# Altium PCB AVR精简学习板_加粗.PCBDOC (part 2 of 2)
Units mm, origin at the board's own origin, x right, y up, seen from the top; angles counter-clockwise.
Board outline 152.4 x 101.6 mm, 2 copper layers (Top Layer, Bottom Layer); 44 components, 51 nets, 211 pads, 1 vias.
Unrouted connection lines stored in the file: 1.
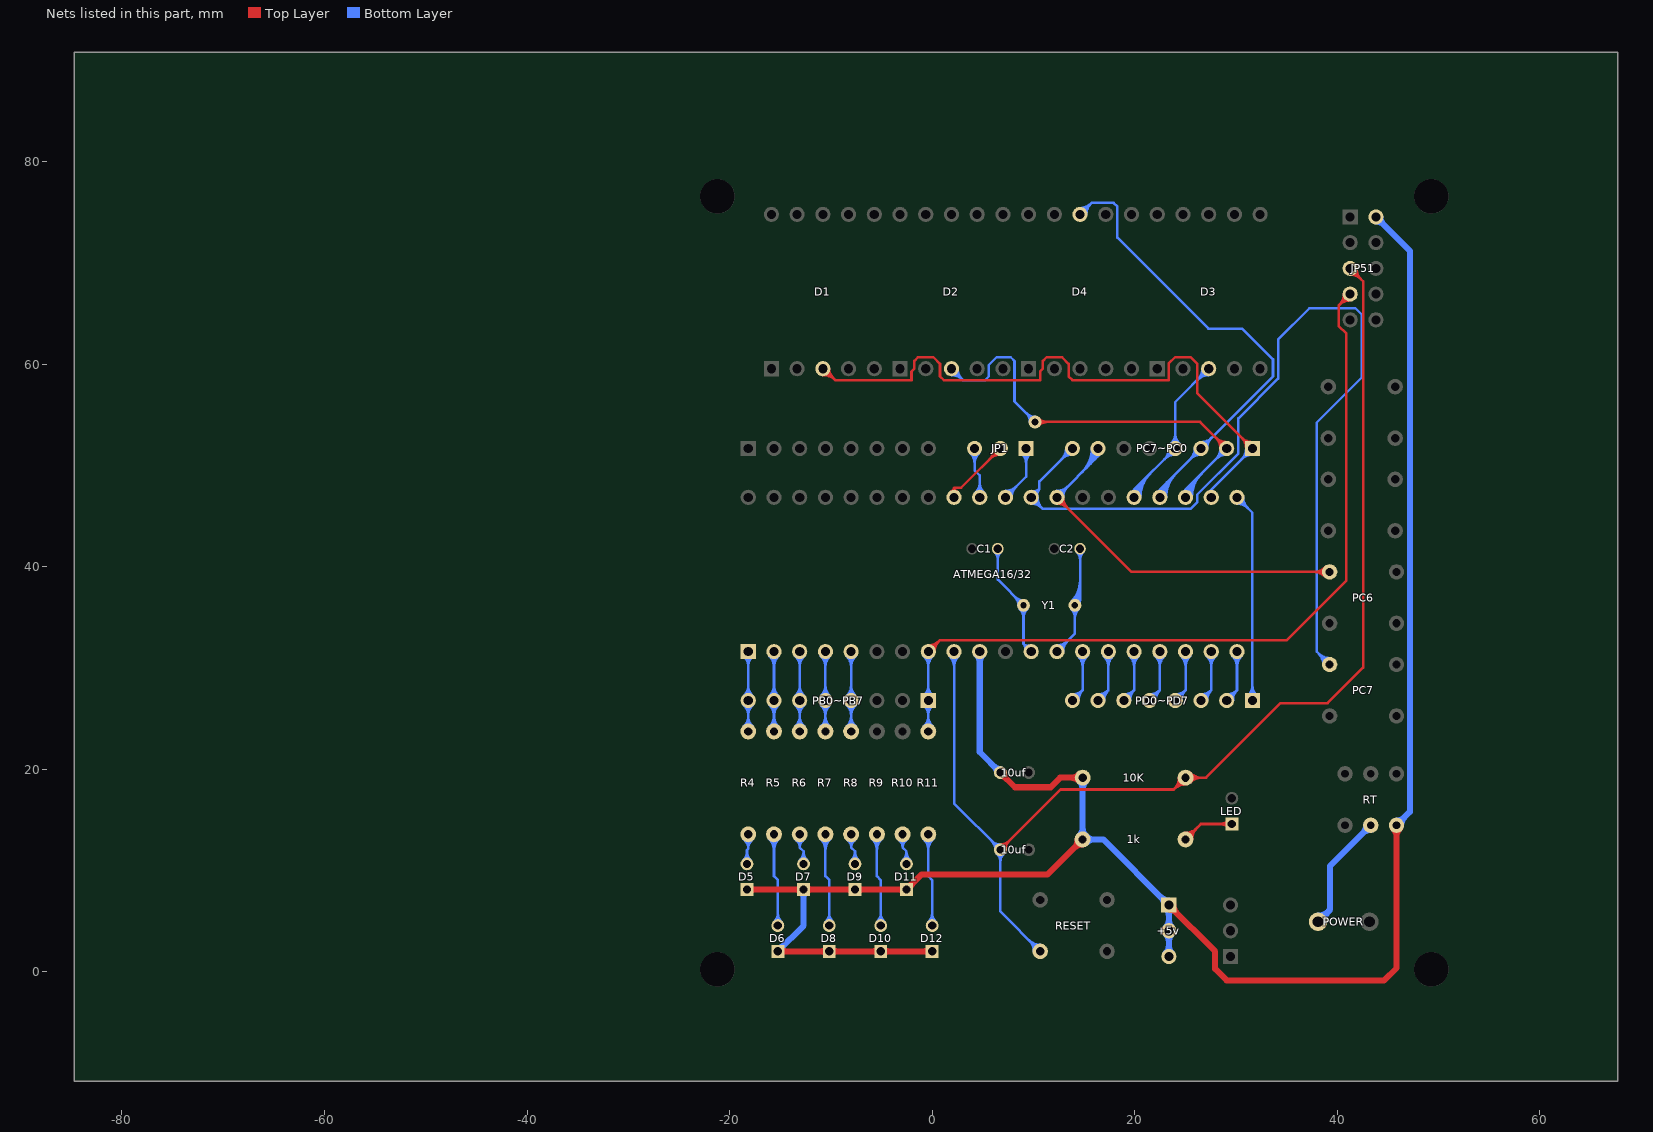
[diagram p2: the nets of this part, all layers, seen from the top]

## Via types
v1: diameter 1.27, hole 0.711, Top Layer to Bottom Layer, 1 vias

## Nets (pads, with @x,y where several pads share a name; then routed paths per layer and width w, separated by ;. In a path a pad name is that pad's centre, name@x,y a point inside that pad or via, vN(x,y) a via of type N, cw(c..) or ccw(c..) an arc to the next point about the centre after c; other vN are vias at no path point) (continued)
Net3_0: ATMEGA16/32.28 PC6.0 PC7~PC0.7 | length 55.9
  Top Layer w0.254: ATMEGA16/32.28@12.319,46.24 cw(c12.319,44.736) 13.383,45.799 cw(c14.446,46.863) ATMEGA16/32.28@12.942,46.863 ; ATMEGA16/32.28@12.319,46.494 cw(c12.319,45.603) 12.949,46.233 cw(c13.579,46.863) ATMEGA16/32.28@12.688,46.863 ; ATMEGA16/32.28@12.319,46.863 19.685,39.497 PC6.0@39.243,39.497 ; PC6.0@38.794,39.048 ccw(c37.71,37.964) 37.71,39.497 ccw(c37.71,41.03) PC6.0@38.794,39.946 ; PC6.0@38.974,39.228 ccw(c38.323,38.577) 38.323,39.497 ccw(c38.323,40.417) PC6.0@38.974,39.766
  Bottom Layer w0.254: ATMEGA16/32.28@12.319,46.863 16.383,50.927 ; ATMEGA16/32.28@12.319,47.232 ccw(c12.319,48.123) 12.949,47.493 ccw(c13.579,46.863) ATMEGA16/32.28@12.688,46.863 ; ATMEGA16/32.28@12.319,47.486 ccw(c12.319,48.99) 13.383,47.927 ccw(c14.446,46.863) ATMEGA16/32.28@12.942,46.863 ; 14.781,49.325 ccw(c12.416,51.689) PC7~PC0.7@15.76,51.689 ; 15.214,49.758 ccw(c13.284,51.689) PC7~PC0.7@16.014,51.689 ; 15.648,50.192 ccw(c14.151,51.689) PC7~PC0.7@16.268,51.689 ; 16.081,50.625 ccw(c15.018,51.689) PC7~PC0.7@16.522,51.689 ; PC7~PC0.7@16.259,51.078 cw(c16.229,50.927) 16.383,50.927 ; PC7~PC0.7@16.383,51.689 16.383,50.927 ; PC7~PC0.7@16.507,51.078 ccw(c16.537,50.927) 16.383,50.927
Net3_2: 
Net4_0: ATMEGA16/32.29 PC7.0 PC7~PC0.8 | length 102.6
  Bottom Layer w0.254: ATMEGA16/32.29@9.779,46.24 cw(c9.779,44.736) 10.843,45.799 cw(c11.906,46.863) ATMEGA16/32.29@10.402,46.863 ; ATMEGA16/32.29@9.779,46.494 cw(c9.779,45.603) 10.409,46.233 cw(c11.039,46.863) ATMEGA16/32.29@10.148,46.863 ; ATMEGA16/32.29@9.908,47.473 ccw(c10.062,48.205) 10.592,47.676 ; ATMEGA16/32.29@10.389,46.992 cw(c11.121,47.146) 10.592,47.676 ; PC7~PC0.8@13.22,51.689 cw(c11.716,51.689) 12.779,50.625 cw(c13.843,49.562) PC7~PC0.8@13.843,51.066 ; PC7~PC0.8@13.474,51.689 cw(c12.583,51.689) 13.213,51.059 cw(c13.843,50.429) PC7~PC0.8@13.843,51.32 ; PC7~PC0.8@13.843,51.689 10.592,48.438 10.592,47.676 ; PC7.0@38.608,30.353 ccw(c37.075,30.353) 38.159,31.437 ccw(c39.243,32.521) PC7.0@39.243,30.988 ; PC7.0@38.862,30.353 ccw(c37.942,30.353) 38.593,31.003 ccw(c39.243,31.654) PC7.0@39.243,30.734 ; PC7.0@39.243,30.353 37.973,31.623 37.973,54.229 42.418,58.674 42.418,64.897 41.783,65.532 37.236,65.532 34.163,62.459 34.163,58.591 30.226,54.654 30.226,51.181 26.162,47.117 26.162,46.355 25.527,45.72 10.922,45.72 ATMEGA16/32.29@9.779,46.863 10.592,47.676
Net5_2: 10K.1 10uf.1@6.731,12.065 ATMEGA16/32.9 JP51.5 RESET.2 | length 141.6
  Top Layer w0.254: 10uf.1@6.731,12.065 12.675,18.009 23.853,18.009 10K.1@25.023,19.178 27.052,19.178 34.417,26.543 39.04,26.543 42.545,30.048 42.545,68.199 JP51.5@41.275,69.469 ; 10uf.1@6.731,12.573 ccw(c6.731,13.799) 7.598,12.932 ccw(c8.465,12.065) 10uf.1@7.239,12.065 ; 10K.1@24.362,19.178 cw(c22.768,19.178) 23.895,18.051 cw(c25.023,16.923) 10K.1@25.023,18.518 ; 10K.1@24.616,19.178 cw(c23.635,19.178) 24.329,18.484 cw(c25.023,17.79) 10K.1@25.023,18.772 ; 10K.1@25.31,18.891 cw(c26.004,18.197) 26.004,19.178 cw(c26.004,20.159) 10K.1@25.31,19.465 ; 10K.1@25.49,18.711 cw(c26.617,17.584) 26.617,19.178 cw(c26.617,20.772) 10K.1@25.49,19.645 ; JP51.5@41.275,68.846 cw(c41.275,67.342) 42.339,68.405 cw(c43.402,69.469) JP51.5@41.898,69.469 ; JP51.5@41.275,69.1 cw(c41.275,68.209) 41.905,68.839 cw(c42.535,69.469) JP51.5@41.644,69.469
  Bottom Layer w0.254: ATMEGA16/32.9@1.718,31.182 cw(c0.655,30.119) 2.159,30.119 cw(c3.663,30.119) ATMEGA16/32.9@2.6,31.182 ; ATMEGA16/32.9@1.898,31.362 cw(c1.268,30.732) 2.159,30.732 cw(c3.05,30.732) ATMEGA16/32.9@2.42,31.362 ; ATMEGA16/32.9@2.159,31.623 2.159,16.637 10uf.1@6.731,12.065 6.731,5.969 RESET.2@10.668,2.032 ; 10uf.1@6.223,12.065 ccw(c4.997,12.065) 5.864,12.932 ccw(c6.731,13.799) 10uf.1@6.731,12.573 ; 10uf.1@6.372,11.706 cw(c5.505,10.839) 6.731,10.839 cw(c7.957,10.839) 10uf.1@7.09,11.706 ; RESET.2@10.033,2.032 ccw(c8.5,2.032) 9.584,3.116 ccw(c10.668,4.2) RESET.2@10.668,2.667 ; RESET.2@10.287,2.032 ccw(c9.367,2.032) 10.018,2.682 ccw(c10.668,3.333) RESET.2@10.668,2.413
Net11_1: POWER.1 RT.1 | length 15.8
  Bottom Layer w0.6: POWER.1@38.1,4.953 39.294,6.147 39.294,10.465 RT.1@43.307,14.478 ; POWER.1@38.1,5.565 ccw(c38.1,7.043) 39.145,5.998 ccw(c40.19,4.953) POWER.1@38.712,4.953 ; RT.1@42.845,14.478 cw(c41.73,14.478) 42.518,13.689 cw(c43.307,12.901) RT.1@43.307,14.016
NetC1_1: ATMEGA16/32.12 C1.1 Y1.2 | length 18.4
  Bottom Layer w0.254: C1.1@6.163,41.469 cw(c5.404,40.71) 6.477,40.71 cw(c7.55,40.71) C1.1@6.791,41.469 ; C1.1@6.477,41.783 6.477,38.735 Y1.2@9.017,36.195 9.017,32.385 ; Y1.2@8.509,36.195 ccw(c7.283,36.195) 8.15,37.062 ccw(c9.017,37.929) Y1.2@9.017,36.703 ; Y1.2@8.658,35.836 cw(c7.791,34.969) 9.017,34.969 cw(c10.243,34.969) Y1.2@9.376,35.836 ; ATMEGA16/32.12@9.177,31.785 ccw(c8.578,31.946) 9.017,32.385 ; ATMEGA16/32.12@9.617,32.225 cw(c9.456,32.824) 9.017,32.385 ; ATMEGA16/32.12@9.779,31.623 9.017,32.385
NetC2_2: ATMEGA16/32.13 C2.2 Y1.1 | length 25.5
  Bottom Layer w0.254: ATMEGA16/32.13@12.319,31.623 14.097,33.401 Y1.1@14.097,36.195 ; ATMEGA16/32.13@12.319,31.992 ccw(c12.319,32.883) 12.949,32.253 ccw(c13.579,31.623) ATMEGA16/32.13@12.688,31.623 ; ATMEGA16/32.13@12.319,32.246 ccw(c12.319,33.75) 13.383,32.687 ccw(c14.446,31.623) ATMEGA16/32.13@12.942,31.623 ; Y1.1@13.738,35.836 cw(c12.871,34.969) 14.097,34.969 cw(c15.323,34.969) Y1.1@14.456,35.836 ; Y1.1@13.738,36.554 ccw(c11.644,38.648) 14.605,38.648 ; Y1.1@13.917,36.375 ccw(c12.257,38.035) 14.605,38.035 ; Y1.1@14.277,36.015 ccw(c13.484,36.808) 14.605,36.808 ; C2.2@14.291,41.469 cw(c13.532,40.71) 14.605,40.71 cw(c15.678,40.71) C2.2@14.919,41.469 ; Y1.1@14.316,36.653 ccw(c14.425,36.883) 14.605,36.703 ; Y1.1@14.555,36.414 cw(c14.785,36.523) 14.605,36.703 ; 14.605,37.421 cw(c12.871,37.421) Y1.1@14.097,36.195 ; C2.2@14.605,41.783 14.605,36.703 ; Y1.1@14.097,36.195 14.605,36.703
NetD1_3: ATMEGA16/32.22 D1.3 PC7~PC0.1 | length 76.1
  Top Layer w0.254: D1.3@-10.795,58.94 cw(c-10.795,57.129) -9.515,58.41 ; D1.3@-10.795,59.194 cw(c-10.795,57.997) -9.948,58.843 ; D1.3@-10.795,59.563 -10.185,59.563 -10.185,59.08 -9.525,58.42 -2.044,58.42 -2.044,59.285 -1.766,59.563 -1.766,60.325 -1.397,60.694 0.127,60.694 0.774,60.047 0.774,58.801 1.143,58.432 10.656,58.432 10.656,59.285 10.934,59.563 10.934,60.325 11.303,60.694 12.827,60.694 13.474,60.047 13.474,58.801 13.843,58.432 23.356,58.432 23.356,60.059 24.003,60.706 25.527,60.706 26.162,60.071 26.162,57.15 PC7~PC0.1@31.623,51.689 ; D1.3@-10.445,59.048 cw(c-10.302,58.837) -10.122,59.017 cw(c-9.881,59.258) D1.3@-10.204,59.366 ; D1.3@-10.172,59.563 ccw(c-8.975,59.563) -9.821,58.716 ; PC7~PC0.1@31,51.689 ccw(c29.496,51.689) 30.559,52.753 ccw(c31.623,53.816) PC7~PC0.1@31.623,52.312 ; PC7~PC0.1@31.254,51.689 ccw(c30.363,51.689) 30.993,52.319 ccw(c31.623,52.949) PC7~PC0.1@31.623,52.058
  Bottom Layer w0.254: ATMEGA16/32.22@27.435,47.474 ccw(c27.405,47.625) 27.559,47.625 ; ATMEGA16/32.22@27.559,46.863 27.559,47.625 ; ATMEGA16/32.22@27.683,47.474 cw(c27.713,47.625) 27.559,47.625 ; PC7~PC0.1@31,51.689 cw(c29.496,51.689) 30.559,50.625 cw(c31.623,49.562) PC7~PC0.1@31.623,51.066 ; PC7~PC0.1@31.254,51.689 cw(c30.363,51.689) 30.993,51.059 cw(c31.623,50.429) PC7~PC0.1@31.623,51.32 ; PC7~PC0.1@31.623,51.689 27.559,47.625
NetD2_3: ATMEGA16/32.23 D2.3 PC7~PC0.2 | length 65
  Top Layer w0.254: v1(10.16,54.305) 26.467,54.305 PC7~PC0.2@29.083,51.689 ; v1@10.519,53.946 cw(c11.386,53.079) 11.386,54.305 cw(c11.386,55.532) v1@10.519,54.664 ; PC7~PC0.2@28.46,51.689 ccw(c26.956,51.689) 28.019,52.753 ccw(c29.083,53.816) PC7~PC0.2@29.083,52.312 ; PC7~PC0.2@28.714,51.689 ccw(c27.823,51.689) 28.453,52.319 ccw(c29.083,52.949) PC7~PC0.2@29.083,52.058
  Bottom Layer w0.254: D2.3@1.905,58.94 cw(c1.905,57.436) 2.969,58.499 cw(c4.032,59.563) D2.3@2.528,59.563 ; D2.3@1.905,59.194 cw(c1.905,58.303) 2.535,58.933 cw(c3.165,59.563) D2.3@2.274,59.563 ; D2.3@1.905,59.563 3.048,58.42 5.207,58.42 5.588,58.801 5.588,59.919 6.363,60.694 7.759,60.694 8.128,60.325 8.128,56.337 v1(10.16,54.305) ; v1@9.652,54.305 ccw(c8.426,54.305) 9.293,55.172 ccw(c10.16,56.04) v1@10.16,54.813 ; ATMEGA16/32.23@24.88,46.863 cw(c26.384,46.863) 25.321,47.927 ; ATMEGA16/32.23@24.895,47.474 ccw(c24.865,47.625) 25.019,47.625 ; ATMEGA16/32.23@25.019,46.863 25.019,47.625 ; ATMEGA16/32.23@25.134,46.863 cw(c27.251,46.863) 25.754,48.36 ; ATMEGA16/32.23@25.143,47.474 cw(c25.173,47.625) 25.019,47.625 ; ATMEGA16/32.23@25.388,46.863 cw(c28.118,46.863) 26.188,48.794 ; ATMEGA16/32.23@25.642,46.863 cw(c28.986,46.863) 26.621,49.227 ; PC7~PC0.2@28.46,51.689 cw(c26.956,51.689) 28.019,50.625 cw(c29.083,49.562) PC7~PC0.2@29.083,51.066 ; PC7~PC0.2@28.714,51.689 cw(c27.823,51.689) 28.453,51.059 cw(c29.083,50.429) PC7~PC0.2@29.083,51.32 ; PC7~PC0.2@29.083,51.689 25.019,47.625
NetD3_3: ATMEGA16/32.25 D3.3 PC7~PC0.4 | length 35.1
  Bottom Layer w0.254: ATMEGA16/32.25@19.8,46.863 cw(c21.304,46.863) 20.241,47.927 ; ATMEGA16/32.25@19.815,47.474 ccw(c19.785,47.625) 19.939,47.625 ; ATMEGA16/32.25@19.939,46.863 19.939,47.625 ; ATMEGA16/32.25@20.054,46.863 cw(c22.171,46.863) 20.674,48.36 ; ATMEGA16/32.25@20.063,47.474 cw(c20.093,47.625) 19.939,47.625 ; ATMEGA16/32.25@20.308,46.863 cw(c23.038,46.863) 21.108,48.794 ; ATMEGA16/32.25@20.562,46.863 cw(c23.906,46.863) 21.541,49.227 ; PC7~PC0.4@23.38,51.689 cw(c21.876,51.689) 22.939,50.625 cw(c24.003,49.562) PC7~PC0.4@24.003,51.066 ; PC7~PC0.4@23.562,52.13 ccw(c22.499,53.193) 24.003,53.193 ccw(c25.507,53.193) PC7~PC0.4@24.444,52.13 ; PC7~PC0.4@23.634,51.689 cw(c22.743,51.689) 23.373,51.059 cw(c24.003,50.429) PC7~PC0.4@24.003,51.32 ; PC7~PC0.4@23.742,51.95 ccw(c23.112,52.58) 24.003,52.58 ccw(c24.894,52.58) PC7~PC0.4@24.264,51.95 ; D3.3@26.682,59.563 cw(c25.178,59.563) 26.241,58.499 cw(c27.305,57.436) D3.3@27.305,58.94 ; D3.3@26.936,59.563 cw(c26.045,59.563) 26.675,58.933 cw(c27.305,58.303) D3.3@27.305,59.194 ; D3.3@27.305,59.563 24.003,56.261 PC7~PC0.4@24.003,51.689 19.939,47.625
NetD4_3: ATMEGA16/32.24 D4.8 PC7~PC0.3 | length 65.3
  Bottom Layer w0.254: D4.8@14.605,74.803 15.748,75.946 17.907,75.946 18.288,75.565 18.288,72.517 27.28,63.525 30.607,63.525 33.655,60.477 33.655,58.801 PC7~PC0.3@26.543,51.689 22.479,47.625 ; D4.8@14.605,75.172 ccw(c14.605,76.063) 15.235,75.433 ccw(c15.865,74.803) D4.8@14.974,74.803 ; D4.8@14.605,75.426 ccw(c14.605,76.93) 15.669,75.867 ccw(c16.732,74.803) D4.8@15.228,74.803 ; ATMEGA16/32.24@22.34,46.863 cw(c23.844,46.863) 22.781,47.927 ; ATMEGA16/32.24@22.355,47.474 ccw(c22.325,47.625) 22.479,47.625 ; ATMEGA16/32.24@22.479,46.863 22.479,47.625 ; ATMEGA16/32.24@22.594,46.863 cw(c24.711,46.863) 23.214,48.36 ; ATMEGA16/32.24@22.603,47.474 cw(c22.633,47.625) 22.479,47.625 ; ATMEGA16/32.24@22.848,46.863 cw(c25.578,46.863) 23.648,48.794 ; ATMEGA16/32.24@23.102,46.863 cw(c26.446,46.863) 24.081,49.227 ; PC7~PC0.3@25.92,51.689 cw(c24.416,51.689) 25.479,50.625 cw(c26.543,49.562) PC7~PC0.3@26.543,51.066 ; PC7~PC0.3@26.174,51.689 cw(c25.283,51.689) 25.913,51.059 cw(c26.543,50.429) PC7~PC0.3@26.543,51.32 ; PC7~PC0.3@26.543,52.058 ccw(c26.543,52.949) 27.173,52.319 ccw(c27.803,51.689) PC7~PC0.3@26.912,51.689 ; PC7~PC0.3@26.543,52.312 ccw(c26.543,53.816) 27.607,52.753 ccw(c28.67,51.689) PC7~PC0.3@27.166,51.689
NetD5_2: D5.2 R4.1 | length 8.3
  Bottom Layer w0.254: D5.2@-18.647,11.027 ccw(c-19.514,11.894) -18.288,11.894 ccw(c-17.062,11.894) D5.2@-17.929,11.027 ; R4.1@-18.585,13.08 cw(c-19.351,12.168) -18.16,12.168 ; R4.1@-18.421,13.274 cw(c-18.893,12.713) -18.16,12.713 cw(c-17.427,12.713) R4.1@-17.899,13.274 ; D5.2@-18.288,10.668 -18.288,12.04 -18.16,12.168 ; R4.1@-18.16,13.585 -18.16,12.168 ; R4.1@-17.735,13.08 ccw(c-16.969,12.168) -18.16,12.168
NetD6_2: D6.2 R5.1 | length 15.1
  Bottom Layer w0.254: R5.1@-16.087,13.118 cw(c-17.214,11.991) -15.62,11.991 cw(c-14.026,11.991) R5.1@-15.153,13.118 ; R5.1@-15.907,13.298 cw(c-16.601,12.604) -15.62,12.604 cw(c-14.639,12.604) R5.1@-15.333,13.298 ; R5.1@-15.62,13.585 -15.62,9.448 -15.24,9.068 D6.2@-15.24,4.572 ; D6.2@-15.599,4.931 ccw(c-16.466,5.798) -15.24,5.798 ccw(c-14.014,5.798) D6.2@-14.881,4.931
NetD7_2: D7.2 R6.1 | length 7.9
  Bottom Layer w0.254: R6.1@-13.467,13.05 cw(c-14.015,12.293) -13.08,12.293 ; R6.1@-13.318,13.256 cw(c-13.655,12.79) -13.08,12.79 cw(c-12.505,12.79) R6.1@-12.842,13.256 ; R6.1@-13.08,13.585 -13.08,12.293 ; D7.2@-13.059,11.027 ccw(c-13.926,11.894) -12.7,11.894 ccw(c-11.474,11.894) D7.2@-12.341,11.027 ; D7.2@-12.7,10.668 -12.7,11.913 -13.08,12.293 ; R6.1@-12.693,13.05 ccw(c-12.145,12.293) -13.08,12.293
NetD8_2: D8.2 R7.1 | length 15.1
  Bottom Layer w0.254: R7.1@-11.007,13.118 cw(c-12.134,11.991) -10.54,11.991 cw(c-8.946,11.991) R7.1@-10.073,13.118 ; R7.1@-10.827,13.298 cw(c-11.521,12.604) -10.54,12.604 cw(c-9.559,12.604) R7.1@-10.253,13.298 ; R7.1@-10.54,13.585 -10.54,9.448 -10.16,9.068 D8.2@-10.16,4.572 ; D8.2@-10.519,4.931 ccw(c-11.386,5.798) -10.16,5.798 ccw(c-8.934,5.798) D8.2@-9.801,4.931
NetD9_2: D9.2 R8.1 | length 7.9
  Bottom Layer w0.254: R8.1@-8.387,13.05 cw(c-8.935,12.293) -8,12.293 ; R8.1@-8.238,13.256 cw(c-8.575,12.79) -8,12.79 cw(c-7.425,12.79) R8.1@-7.762,13.256 ; R8.1@-8,13.585 -8,12.293 ; D9.2@-7.979,11.027 ccw(c-8.846,11.894) -7.62,11.894 ccw(c-6.394,11.894) D9.2@-7.261,11.027 ; D9.2@-7.62,10.668 -7.62,11.913 -8,12.293 ; R8.1@-7.613,13.05 ccw(c-7.065,12.293) -8,12.293
NetD10_2: D10.2 R9.1 | length 15.1
  Bottom Layer w0.254: R9.1@-5.927,13.118 cw(c-7.054,11.991) -5.46,11.991 cw(c-3.866,11.991) R9.1@-4.993,13.118 ; R9.1@-5.747,13.298 cw(c-6.441,12.604) -5.46,12.604 cw(c-4.479,12.604) R9.1@-5.173,13.298 ; R9.1@-5.46,13.585 -5.46,9.448 -5.08,9.068 D10.2@-5.08,4.572 ; D10.2@-5.439,4.931 ccw(c-6.306,5.798) -5.08,5.798 ccw(c-3.854,5.798) D10.2@-4.721,4.931
NetD11_2: D11.2 R10.1 | length 7.9
  Bottom Layer w0.254: R10.1@-3.307,13.05 cw(c-3.855,12.293) -2.92,12.293 ; R10.1@-3.158,13.256 cw(c-3.495,12.79) -2.92,12.79 cw(c-2.345,12.79) R10.1@-2.682,13.256 ; R10.1@-2.92,13.585 -2.92,12.293 ; D11.2@-2.899,11.027 ccw(c-3.766,11.894) -2.54,11.894 ccw(c-1.314,11.894) D11.2@-2.181,11.027 ; D11.2@-2.54,10.668 -2.54,11.913 -2.92,12.293 ; R10.1@-2.533,13.05 ccw(c-1.985,12.293) -2.92,12.293
NetD12_2: D12.2 R11.1 | length 15.1
  Bottom Layer w0.254: R11.1@-0.847,13.118 cw(c-1.974,11.991) -0.38,11.991 cw(c1.214,11.991) R11.1@0.087,13.118 ; R11.1@-0.667,13.298 cw(c-1.361,12.604) -0.38,12.604 cw(c0.601,12.604) R11.1@-0.093,13.298 ; R11.1@-0.38,13.585 -0.38,9.448 0,9.068 D12.2@0,4.572 ; D12.2@-0.359,4.931 ccw(c-1.226,5.798) 0,5.798 ccw(c1.226,5.798) D12.2@0.359,4.931
NetJP1_1: ATMEGA16/32.30 JP1.1 | length 13.2
  Bottom Layer w0.254: ATMEGA16/32.30@7.239,46.863 9.271,48.895 JP1.1@9.271,51.689 ; ATMEGA16/32.30@7.239,47.232 ccw(c7.239,48.123) 7.869,47.493 ccw(c8.499,46.863) ATMEGA16/32.30@7.608,46.863 ; ATMEGA16/32.30@7.239,47.486 ccw(c7.239,48.99) 8.303,47.927 ccw(c9.366,46.863) ATMEGA16/32.30@7.862,46.863 ; JP1.1@8.83,51.248 cw(c7.767,50.185) 9.271,50.185 cw(c10.775,50.185) JP1.1@9.712,51.248 ; JP1.1@9.01,51.428 cw(c8.38,50.798) 9.271,50.798 cw(c10.162,50.798) JP1.1@9.532,51.428
NetJP1_2: ATMEGA16/32.32 JP1.2 | length 11.9
  Top Layer w0.254: ATMEGA16/32.32@1.902,47.431 ccw(c1.723,47.828) 2.159,47.828 ; ATMEGA16/32.32@2.159,46.863 2.159,47.828 ; ATMEGA16/32.32@2.416,47.431 cw(c2.595,47.828) 2.159,47.828 ; JP1.2@6.108,51.689 cw(c4.604,51.689) 5.667,50.625 cw(c6.731,49.562) JP1.2@6.731,51.066 ; JP1.2@6.362,51.689 cw(c5.471,51.689) 6.101,51.059 cw(c6.731,50.429) JP1.2@6.731,51.32 ; JP1.2@6.731,51.689 2.87,47.828 2.159,47.828
NetJP1_3: ATMEGA16/32.31 JP1.3 | length 12.6
  Bottom Layer w0.254: JP1.3@3.75,51.248 cw(c2.687,50.185) 4.191,50.185 cw(c5.695,50.185) JP1.3@4.632,51.248 ; JP1.3@3.93,51.428 cw(c3.3,50.798) 4.191,50.798 cw(c5.082,50.798) JP1.3@4.452,51.428 ; JP1.3@4.191,51.689 4.191,49.53 4.699,49.022 ATMEGA16/32.31@4.699,46.863 ; ATMEGA16/32.31@4.258,47.304 ccw(c3.195,48.367) 4.699,48.367 ccw(c6.203,48.367) ATMEGA16/32.31@5.14,47.304 ; ATMEGA16/32.31@4.438,47.124 ccw(c3.808,47.754) 4.699,47.754 ccw(c5.59,47.754) ATMEGA16/32.31@4.96,47.124
NetJP2_1: ATMEGA16/32.8 JP51.7 PB0~PB7.1 R11.2 | length 103.6
  Top Layer w0.254: ATMEGA16/32.8@-0.381,31.623 0.762,32.766 35.027,32.766 40.894,38.633 40.894,63.043 40.144,63.793 40.144,65.798 JP51.7@41.275,66.929 ; ATMEGA16/32.8@-0.381,31.992 ccw(c-0.381,32.883) 0.249,32.253 ccw(c0.879,31.623) ATMEGA16/32.8@-0.012,31.623 ; ATMEGA16/32.8@-0.381,32.246 ccw(c-0.381,33.75) 0.683,32.687 ccw(c1.746,31.623) ATMEGA16/32.8@0.242,31.623 ; JP51.7@40.652,66.929 cw(c39.148,66.929) 40.211,65.865 cw(c41.275,64.802) JP51.7@41.275,66.306 ; JP51.7@40.906,66.929 cw(c40.015,66.929) 40.645,66.299 cw(c41.275,65.669) JP51.7@41.275,66.56
  Bottom Layer w0.254: R11.2@-0.826,24.232 ccw(c-1.759,25.248) -0.38,25.248 ; PB0~PB7.1@-0.822,26.356 cw(c-1.885,25.293) -0.381,25.293 cw(c1.123,25.293) PB0~PB7.1@0.06,26.356 ; PB0~PB7.1@-0.822,27.238 ccw(c-1.885,28.301) -0.381,28.301 ccw(c1.123,28.301) PB0~PB7.1@0.06,27.238 ; ATMEGA16/32.8@-0.822,31.182 cw(c-1.885,30.119) -0.381,30.119 cw(c1.123,30.119) ATMEGA16/32.8@0.06,31.182 ; R11.2@-0.655,24.045 ccw(c-1.228,24.67) -0.38,24.67 ccw(c0.468,24.67) R11.2@-0.105,24.045 ; PB0~PB7.1@-0.642,26.536 cw(c-1.272,25.906) -0.381,25.906 cw(c0.51,25.906) PB0~PB7.1@-0.12,26.536 ; PB0~PB7.1@-0.642,27.058 ccw(c-1.272,27.688) -0.381,27.688 ccw(c0.51,27.688) PB0~PB7.1@-0.12,27.058 ; ATMEGA16/32.8@-0.642,31.362 cw(c-1.272,30.732) -0.381,30.732 cw(c0.51,30.732) ATMEGA16/32.8@-0.12,31.362 ; ATMEGA16/32.8@-0.381,31.623 PB0~PB7.1@-0.381,26.797 -0.381,25.249 -0.38,25.248 ; R11.2@-0.38,23.745 -0.38,25.248 ; R11.2@0.067,24.232 cw(c0.999,25.248) -0.38,25.248
NetJP2_4: ATMEGA16/32.5 PB0~PB7.4 R8.2 | length 22.9
  Bottom Layer w0.254: R8.2@-8.446,24.232 ccw(c-9.379,25.248) -8,25.248 ; PB0~PB7.4@-8.442,26.356 cw(c-9.505,25.293) -8.001,25.293 cw(c-6.497,25.293) PB0~PB7.4@-7.56,26.356 ; PB0~PB7.4@-8.442,27.238 ccw(c-9.505,28.301) -8.001,28.301 ccw(c-6.497,28.301) PB0~PB7.4@-7.56,27.238 ; ATMEGA16/32.5@-8.442,31.182 cw(c-9.505,30.119) -8.001,30.119 cw(c-6.497,30.119) ATMEGA16/32.5@-7.56,31.182 ; R8.2@-8.275,24.045 ccw(c-8.848,24.67) -8,24.67 ccw(c-7.152,24.67) R8.2@-7.725,24.045 ; PB0~PB7.4@-8.262,26.536 cw(c-8.892,25.906) -8.001,25.906 cw(c-7.11,25.906) PB0~PB7.4@-7.74,26.536 ; PB0~PB7.4@-8.262,27.058 ccw(c-8.892,27.688) -8.001,27.688 ccw(c-7.11,27.688) PB0~PB7.4@-7.74,27.058 ; ATMEGA16/32.5@-8.262,31.362 cw(c-8.892,30.732) -8.001,30.732 cw(c-7.11,30.732) ATMEGA16/32.5@-7.74,31.362 ; ATMEGA16/32.5@-8.001,31.623 PB0~PB7.4@-8.001,26.797 -8.001,25.249 -8,25.248 ; R8.2@-8,23.745 -8,25.248 ; R8.2@-7.553,24.232 cw(c-6.621,25.248) -8,25.248
NetJP2_5: ATMEGA16/32.4 PB0~PB7.5 R7.2 | length 22.9
  Bottom Layer w0.254: R7.2@-10.986,24.232 ccw(c-11.919,25.248) -10.54,25.248 ; PB0~PB7.5@-10.982,26.356 cw(c-12.045,25.293) -10.541,25.293 cw(c-9.037,25.293) PB0~PB7.5@-10.1,26.356 ; PB0~PB7.5@-10.982,27.238 ccw(c-12.045,28.301) -10.541,28.301 ccw(c-9.037,28.301) PB0~PB7.5@-10.1,27.238 ; ATMEGA16/32.4@-10.982,31.182 cw(c-12.045,30.119) -10.541,30.119 cw(c-9.037,30.119) ATMEGA16/32.4@-10.1,31.182 ; R7.2@-10.815,24.045 ccw(c-11.388,24.67) -10.54,24.67 ccw(c-9.692,24.67) R7.2@-10.265,24.045 ; PB0~PB7.5@-10.802,26.536 cw(c-11.432,25.906) -10.541,25.906 cw(c-9.65,25.906) PB0~PB7.5@-10.28,26.536 ; PB0~PB7.5@-10.802,27.058 ccw(c-11.432,27.688) -10.541,27.688 ccw(c-9.65,27.688) PB0~PB7.5@-10.28,27.058 ; ATMEGA16/32.4@-10.802,31.362 cw(c-11.432,30.732) -10.541,30.732 cw(c-9.65,30.732) ATMEGA16/32.4@-10.28,31.362 ; ATMEGA16/32.4@-10.541,31.623 PB0~PB7.5@-10.541,26.797 -10.541,25.249 -10.54,25.248 ; R7.2@-10.54,23.745 -10.54,25.248 ; R7.2@-10.093,24.232 cw(c-9.161,25.248) -10.54,25.248
NetJP2_6: ATMEGA16/32.3 PB0~PB7.6 R6.2 | length 22.9
  Bottom Layer w0.254: R6.2@-13.526,24.232 ccw(c-14.459,25.248) -13.08,25.248 ; PB0~PB7.6@-13.522,26.356 cw(c-14.585,25.293) -13.081,25.293 cw(c-11.577,25.293) PB0~PB7.6@-12.64,26.356 ; PB0~PB7.6@-13.522,27.238 ccw(c-14.585,28.301) -13.081,28.301 ccw(c-11.577,28.301) PB0~PB7.6@-12.64,27.238 ; ATMEGA16/32.3@-13.522,31.182 cw(c-14.585,30.119) -13.081,30.119 cw(c-11.577,30.119) ATMEGA16/32.3@-12.64,31.182 ; R6.2@-13.355,24.045 ccw(c-13.928,24.67) -13.08,24.67 ccw(c-12.232,24.67) R6.2@-12.805,24.045 ; PB0~PB7.6@-13.342,26.536 cw(c-13.972,25.906) -13.081,25.906 cw(c-12.19,25.906) PB0~PB7.6@-12.82,26.536 ; PB0~PB7.6@-13.342,27.058 ccw(c-13.972,27.688) -13.081,27.688 ccw(c-12.19,27.688) PB0~PB7.6@-12.82,27.058 ; ATMEGA16/32.3@-13.342,31.362 cw(c-13.972,30.732) -13.081,30.732 cw(c-12.19,30.732) ATMEGA16/32.3@-12.82,31.362 ; ATMEGA16/32.3@-13.081,31.623 PB0~PB7.6@-13.081,26.797 -13.081,25.249 -13.08,25.248 ; R6.2@-13.08,23.745 -13.08,25.248 ; R6.2@-12.633,24.232 cw(c-11.701,25.248) -13.08,25.248
NetJP2_7: ATMEGA16/32.2 PB0~PB7.7 R5.2 | length 22.9
  Bottom Layer w0.254: R5.2@-16.066,24.232 ccw(c-16.999,25.248) -15.62,25.248 ; PB0~PB7.7@-16.062,26.356 cw(c-17.125,25.293) -15.621,25.293 cw(c-14.117,25.293) PB0~PB7.7@-15.18,26.356 ; PB0~PB7.7@-16.062,27.238 ccw(c-17.125,28.301) -15.621,28.301 ccw(c-14.117,28.301) PB0~PB7.7@-15.18,27.238 ; ATMEGA16/32.2@-16.062,31.182 cw(c-17.125,30.119) -15.621,30.119 cw(c-14.117,30.119) ATMEGA16/32.2@-15.18,31.182 ; R5.2@-15.895,24.045 ccw(c-16.468,24.67) -15.62,24.67 ccw(c-14.772,24.67) R5.2@-15.345,24.045 ; PB0~PB7.7@-15.882,26.536 cw(c-16.512,25.906) -15.621,25.906 cw(c-14.73,25.906) PB0~PB7.7@-15.36,26.536 ; PB0~PB7.7@-15.882,27.058 ccw(c-16.512,27.688) -15.621,27.688 ccw(c-14.73,27.688) PB0~PB7.7@-15.36,27.058 ; ATMEGA16/32.2@-15.882,31.362 cw(c-16.512,30.732) -15.621,30.732 cw(c-14.73,30.732) ATMEGA16/32.2@-15.36,31.362 ; ATMEGA16/32.2@-15.621,31.623 PB0~PB7.7@-15.621,26.797 -15.621,25.249 -15.62,25.248 ; R5.2@-15.62,23.745 -15.62,25.248 ; R5.2@-15.173,24.232 cw(c-14.241,25.248) -15.62,25.248
NetJP2_8: ATMEGA16/32.1 PB0~PB7.8 R4.2 | length 22.9
  Bottom Layer w0.254: R4.2@-18.606,24.232 ccw(c-19.539,25.248) -18.16,25.248 ; PB0~PB7.8@-18.602,26.356 cw(c-19.665,25.293) -18.161,25.293 cw(c-16.657,25.293) PB0~PB7.8@-17.72,26.356 ; PB0~PB7.8@-18.602,27.238 ccw(c-19.665,28.301) -18.161,28.301 ccw(c-16.657,28.301) PB0~PB7.8@-17.72,27.238 ; ATMEGA16/32.1@-18.602,31.182 cw(c-19.665,30.119) -18.161,30.119 cw(c-16.657,30.119) ATMEGA16/32.1@-17.72,31.182 ; R4.2@-18.435,24.045 ccw(c-19.008,24.67) -18.16,24.67 ccw(c-17.312,24.67) R4.2@-17.885,24.045 ; PB0~PB7.8@-18.422,26.536 cw(c-19.052,25.906) -18.161,25.906 cw(c-17.27,25.906) PB0~PB7.8@-17.9,26.536 ; PB0~PB7.8@-18.422,27.058 ccw(c-19.052,27.688) -18.161,27.688 ccw(c-17.27,27.688) PB0~PB7.8@-17.9,27.058 ; ATMEGA16/32.1@-18.422,31.362 cw(c-19.052,30.732) -18.161,30.732 cw(c-17.27,30.732) ATMEGA16/32.1@-17.9,31.362 ; ATMEGA16/32.1@-18.161,31.623 PB0~PB7.8@-18.161,26.797 -18.161,25.249 -18.16,25.248 ; R4.2@-18.16,23.745 -18.16,25.248 ; R4.2@-17.713,24.232 cw(c-16.781,25.248) -18.16,25.248
NetJP3_1: ATMEGA16/32.21 PD0~PD7.1 | length 28.2
  Bottom Layer w0.254: ATMEGA16/32.21@30.099,46.24 cw(c30.099,44.736) 31.163,45.799 cw(c32.226,46.863) ATMEGA16/32.21@30.722,46.863 ; ATMEGA16/32.21@30.099,46.494 cw(c30.099,45.603) 30.729,46.233 cw(c31.359,46.863) ATMEGA16/32.21@30.468,46.863 ; ATMEGA16/32.21@30.099,46.863 31.623,45.339 PD0~PD7.1@31.623,26.797 ; PD0~PD7.1@31.182,27.238 ccw(c30.119,28.301) 31.623,28.301 ccw(c33.127,28.301) PD0~PD7.1@32.064,27.238 ; PD0~PD7.1@31.362,27.058 ccw(c30.732,27.688) 31.623,27.688 ccw(c32.514,27.688) PD0~PD7.1@31.884,27.058
NetJP3_2: ATMEGA16/32.20 PD0~PD7.2 | length 12.5
  Bottom Layer w0.254: PD0~PD7.2@29.083,26.797 30.099,27.813 ; PD0~PD7.2@29.095,27.166 ccw(c29.121,27.962) 29.685,27.399 ccw(c30.248,26.835) PD0~PD7.2@29.452,26.809 ; PD0~PD7.2@29.103,27.42 ccw(c29.148,28.764) 30.099,27.813 ; ATMEGA16/32.20@29.658,31.182 cw(c28.595,30.119) 30.099,30.119 cw(c31.603,30.119) ATMEGA16/32.20@30.54,31.182 ; PD0~PD7.2@29.706,26.817 cw(c31.05,26.862) 30.099,27.813 ; ATMEGA16/32.20@29.838,31.362 cw(c29.208,30.732) 30.099,30.732 cw(c30.99,30.732) ATMEGA16/32.20@30.36,31.362 ; ATMEGA16/32.20@30.099,31.623 30.099,27.813
NetJP3_3: ATMEGA16/32.19 PD0~PD7.3 | length 12.5
  Bottom Layer w0.254: PD0~PD7.3@26.543,26.797 27.559,27.813 ; PD0~PD7.3@26.555,27.166 ccw(c26.581,27.962) 27.145,27.399 ccw(c27.708,26.835) PD0~PD7.3@26.912,26.809 ; PD0~PD7.3@26.563,27.42 ccw(c26.608,28.764) 27.559,27.813 ; ATMEGA16/32.19@27.118,31.182 cw(c26.055,30.119) 27.559,30.119 cw(c29.063,30.119) ATMEGA16/32.19@28,31.182 ; PD0~PD7.3@27.166,26.817 cw(c28.51,26.862) 27.559,27.813 ; ATMEGA16/32.19@27.298,31.362 cw(c26.668,30.732) 27.559,30.732 cw(c28.45,30.732) ATMEGA16/32.19@27.82,31.362 ; ATMEGA16/32.19@27.559,31.623 27.559,27.813
NetJP3_4: ATMEGA16/32.18 PD0~PD7.4 | length 12.5
  Bottom Layer w0.254: PD0~PD7.4@24.003,26.797 25.019,27.813 ; PD0~PD7.4@24.015,27.166 ccw(c24.041,27.962) 24.605,27.399 ccw(c25.168,26.835) PD0~PD7.4@24.372,26.809 ; PD0~PD7.4@24.023,27.42 ccw(c24.068,28.764) 25.019,27.813 ; ATMEGA16/32.18@24.578,31.182 cw(c23.515,30.119) 25.019,30.119 cw(c26.523,30.119) ATMEGA16/32.18@25.46,31.182 ; PD0~PD7.4@24.626,26.817 cw(c25.97,26.862) 25.019,27.813 ; ATMEGA16/32.18@24.758,31.362 cw(c24.128,30.732) 25.019,30.732 cw(c25.91,30.732) ATMEGA16/32.18@25.28,31.362 ; ATMEGA16/32.18@25.019,31.623 25.019,27.813
NetJP3_5: ATMEGA16/32.17 PD0~PD7.5 | length 12.5
  Bottom Layer w0.254: PD0~PD7.5@21.463,26.797 22.479,27.813 ; PD0~PD7.5@21.475,27.166 ccw(c21.501,27.962) 22.065,27.399 ccw(c22.628,26.835) PD0~PD7.5@21.832,26.809 ; PD0~PD7.5@21.483,27.42 ccw(c21.528,28.764) 22.479,27.813 ; ATMEGA16/32.17@22.038,31.182 cw(c20.975,30.119) 22.479,30.119 cw(c23.983,30.119) ATMEGA16/32.17@22.92,31.182 ; PD0~PD7.5@22.086,26.817 cw(c23.43,26.862) 22.479,27.813 ; ATMEGA16/32.17@22.218,31.362 cw(c21.588,30.732) 22.479,30.732 cw(c23.37,30.732) ATMEGA16/32.17@22.74,31.362 ; ATMEGA16/32.17@22.479,31.623 22.479,27.813
NetJP3_6: ATMEGA16/32.16 PD0~PD7.6 | length 12.5
  Bottom Layer w0.254: PD0~PD7.6@18.923,26.797 19.939,27.813 ; PD0~PD7.6@18.935,27.166 ccw(c18.961,27.962) 19.525,27.399 ccw(c20.088,26.835) PD0~PD7.6@19.292,26.809 ; PD0~PD7.6@18.943,27.42 ccw(c18.988,28.764) 19.939,27.813 ; ATMEGA16/32.16@19.498,31.182 cw(c18.435,30.119) 19.939,30.119 cw(c21.443,30.119) ATMEGA16/32.16@20.38,31.182 ; PD0~PD7.6@19.546,26.817 cw(c20.89,26.862) 19.939,27.813 ; ATMEGA16/32.16@19.678,31.362 cw(c19.048,30.732) 19.939,30.732 cw(c20.83,30.732) ATMEGA16/32.16@20.2,31.362 ; ATMEGA16/32.16@19.939,31.623 19.939,27.813
NetJP3_7: ATMEGA16/32.15 PD0~PD7.7 | length 12.5
  Bottom Layer w0.254: PD0~PD7.7@16.383,26.797 17.399,27.813 ; PD0~PD7.7@16.395,27.166 ccw(c16.421,27.962) 16.985,27.399 ccw(c17.548,26.835) PD0~PD7.7@16.752,26.809 ; PD0~PD7.7@16.403,27.42 ccw(c16.448,28.764) 17.399,27.813 ; ATMEGA16/32.15@16.958,31.182 cw(c15.895,30.119) 17.399,30.119 cw(c18.903,30.119) ATMEGA16/32.15@17.84,31.182 ; PD0~PD7.7@17.006,26.817 cw(c18.35,26.862) 17.399,27.813 ; ATMEGA16/32.15@17.138,31.362 cw(c16.508,30.732) 17.399,30.732 cw(c18.29,30.732) ATMEGA16/32.15@17.66,31.362 ; ATMEGA16/32.15@17.399,31.623 17.399,27.813
NetJP3_8: ATMEGA16/32.14 PD0~PD7.8 | length 12.5
  Bottom Layer w0.254: PD0~PD7.8@13.843,26.797 14.859,27.813 ; PD0~PD7.8@13.855,27.166 ccw(c13.881,27.962) 14.445,27.399 ccw(c15.008,26.835) PD0~PD7.8@14.212,26.809 ; PD0~PD7.8@13.863,27.42 ccw(c13.908,28.764) 14.859,27.813 ; ATMEGA16/32.14@14.418,31.182 cw(c13.355,30.119) 14.859,30.119 cw(c16.363,30.119) ATMEGA16/32.14@15.3,31.182 ; PD0~PD7.8@14.466,26.817 cw(c15.81,26.862) 14.859,27.813 ; ATMEGA16/32.14@14.598,31.362 cw(c13.968,30.732) 14.859,30.732 cw(c15.75,30.732) ATMEGA16/32.14@15.12,31.362 ; ATMEGA16/32.14@14.859,31.623 14.859,27.813
NetLED_1: 1k.2 LED.1 | length 11.2
  Top Layer w0.254: 1k.2@25.015,13.08 26.54,14.605 LED.1@29.591,14.605 ; 1k.2@25.015,13.486 ccw(c25.015,14.468) 25.709,13.774 ccw(c26.403,13.08) 1k.2@25.422,13.08 ; 1k.2@25.015,13.74 ccw(c25.015,15.335) 26.143,14.207 ccw(c27.27,13.08) 1k.2@25.676,13.08 ; LED.1@29.232,14.246 ccw(c28.365,13.379) 28.365,14.605 ccw(c28.365,15.831) LED.1@29.232,14.964
VCC: 1k.1 10K.2 10uf.1@6.731,19.685 +5v.1 +5v.2 +5v.3 ATMEGA16/32.10 D5.1 D6.1 D7.1 D8.1 D9.1 D10.1 D11.1 D12.1 JP51.2 RT.2 | length 253
  Top Layer w0.6: D5.1@-18.288,8.128 D7.1@-12.7,8.128 D9.1@-7.62,8.128 D11.1@-2.54,8.128 -1.041,9.627 11.402,9.627 1k.1@14.855,13.08 ; D5.1@-18.051,7.891 cw(c-17.479,7.319) -17.479,8.128 cw(c-17.479,8.937) D5.1@-18.051,8.365 ; D6.1@-15.24,2.032 D8.1@-10.16,2.032 D10.1@-5.08,2.032 D12.1@0,2.032 ; D6.1@-15.003,1.795 cw(c-14.431,1.223) -14.431,2.032 cw(c-14.431,2.841) D6.1@-15.003,2.269 ; D7.1@-12.937,7.891 ccw(c-13.509,7.319) -13.509,8.128 ccw(c-13.509,8.937) D7.1@-12.937,8.365 ; D7.1@-12.463,7.891 cw(c-11.891,7.319) -11.891,8.128 cw(c-11.891,8.937) D7.1@-12.463,8.365 ; D8.1@-10.397,1.795 ccw(c-10.969,1.223) -10.969,2.032 ccw(c-10.969,2.841) D8.1@-10.397,2.269 ; D8.1@-9.923,1.795 cw(c-9.351,1.223) -9.351,2.032 cw(c-9.351,2.841) D8.1@-9.923,2.269 ; D9.1@-7.857,7.891 ccw(c-8.429,7.319) -8.429,8.128 ccw(c-8.429,8.937) D9.1@-7.857,8.365 ; D9.1@-7.383,7.891 cw(c-6.811,7.319) -6.811,8.128 cw(c-6.811,8.937) D9.1@-7.383,8.365 ; D10.1@-5.317,1.795 ccw(c-5.889,1.223) -5.889,2.032 ccw(c-5.889,2.841) D10.1@-5.317,2.269 ; D10.1@-4.843,1.795 cw(c-4.271,1.223) -4.271,2.032 cw(c-4.271,2.841) D10.1@-4.843,2.269 ; D11.1@-2.777,7.891 ccw(c-3.349,7.319) -3.349,8.128 ccw(c-3.349,8.937) D11.1@-2.777,8.365 ; D11.1@-2.54,8.463 ccw(c-2.54,9.272) -1.968,8.7 ccw(c-1.396,8.128) D11.1@-2.205,8.128 ; D12.1@-0.237,1.795 ccw(c-0.809,1.223) -0.809,2.032 ccw(c-0.809,2.841) D12.1@-0.237,2.269 ; 10uf.1@6.731,19.35 cw(c6.731,18.541) 7.303,19.113 cw(c7.875,19.685) 10uf.1@7.066,19.685 ; 10uf.1@6.731,19.685 8.179,18.237 11.709,18.237 12.65,19.178 10K.2@14.863,19.178 ; 1k.1@14.368,13.08 cw(c13.191,13.08) 14.023,12.248 cw(c14.855,11.416) 1k.1@14.855,12.593 ; 10K.2@14.518,18.833 ccw(c13.686,18.001) 13.686,19.178 ccw(c13.686,20.355) 10K.2@14.518,19.523 ; +5v.1@23.368,6.154 cw(c23.368,5.068) 24.136,5.836 cw(c24.904,6.604) +5v.1@23.818,6.604 ; +5v.1@23.368,6.604 27.94,2.032 27.94,0.305 29.083,-0.838 44.628,-0.838 45.847,0.381 RT.2@45.847,14.478 ; RT.2@45.52,14.151 cw(c44.732,13.363) 45.847,13.363 cw(c46.962,13.363) RT.2@46.174,14.151
  Bottom Layer w0.6: D6.1@-15.24,2.032 -12.7,4.572 D7.1@-12.7,8.128 ; D6.1@-15.24,2.367 ccw(c-15.24,3.176) -14.668,2.604 ccw(c-14.096,2.032) D6.1@-14.905,2.032 ; D7.1@-12.937,7.891 cw(c-13.509,7.319) -12.7,7.319 cw(c-11.891,7.319) D7.1@-12.463,7.891 ; ATMEGA16/32.10@4.381,31.305 cw(c3.613,30.537) 4.699,30.537 cw(c5.785,30.537) ATMEGA16/32.10@5.017,31.305 ; ATMEGA16/32.10@4.699,31.623 4.699,21.717 10uf.1@6.731,19.685 ; 10uf.1@6.396,19.685 ccw(c5.587,19.685) 6.159,20.257 ccw(c6.731,20.829) 10uf.1@6.731,20.02 ; 1k.1@14.511,13.425 ccw(c13.679,14.257) 14.855,14.257 ccw(c16.032,14.257) 15.2,13.425 ccw(c16.032,14.257) 16.032,13.08 ccw(c16.032,11.903) 1k.1@15.2,12.735 ; 10K.2@14.518,18.833 cw(c13.686,18.001) 14.863,18.001 cw(c16.039,18.001) 10K.2@15.207,18.833 ; 10K.2@14.863,19.178 14.863,16.111 14.855,16.104 1k.1@14.855,13.08 16.892,13.08 +5v.1@23.368,6.604 +5v.2@23.368,4.064 +5v.3@23.368,1.524 ; +5v.1@22.918,6.604 ccw(c21.832,6.604) 22.6,7.372 ccw(c23.368,8.14) +5v.1@23.368,7.054 ; +5v.3@23.05,1.842 ccw(c22.282,2.61) 23.368,2.61 ccw(c24.454,2.61) +5v.3@23.686,1.842 ; +5v.2@23.05,3.746 cw(c22.282,2.978) 23.368,2.978 cw(c24.454,2.978) +5v.2@23.686,3.746 ; +5v.2@23.05,4.382 ccw(c22.282,5.15) 23.368,5.15 ccw(c24.454,5.15) +5v.2@23.686,4.382 ; +5v.1@23.05,6.286 cw(c22.282,5.518) 23.368,5.518 cw(c24.454,5.518) +5v.1@23.686,6.286 ; JP51.2@43.815,74.099 cw(c43.815,73.013) 44.583,73.781 cw(c45.351,74.549) JP51.2@44.265,74.549 ; JP51.2@43.815,74.549 47.168,71.196 47.168,15.799 RT.2@45.847,14.478 ; RT.2@45.847,14.94 ccw(c45.847,16.055) 46.636,15.267 ccw(c47.424,14.478) RT.2@46.309,14.478
pads on no net: D1.8 D2.8 D3.8 D4.3 JP51.3 PC4.1 PC4.3 PC5.1 PC5.3 PC6.1 PC6.3 PC7.1 RESET.1 RESET.3 RT.0 RT.5
copper on no net: | length 141.8
  Top Layer w0.254: -29.21,-1.524 -28.702,-3.048 ; -29.21,78.994 -28.702,80.518 ; -28.956,-3.048 -28.448,-3.048 ; -28.956,80.518 -28.448,80.518 ; -28.702,30.711 -28.702,-3.048 ; -28.702,46.759 -28.702,80.518 ; -28.194,-1.524 -28.702,-3.048 ; -28.194,78.994 -28.702,80.518 ; -24.512,83.185 -24.51,82.677 ; -22.989,83.444 -24.511,82.931 ; -22.985,82.428 -24.511,82.931 ; 5.184,83.029 -24.511,82.931 ; 22.756,83.087 52.451,83.185 ; 50.925,83.688 52.451,83.185 ; 50.929,82.672 52.451,83.185 ; 52.45,83.439 52.452,82.931

## Polygon pours and split planes (outlines as drawn)
no net on Top Layer (hatched 45Degree grid 0.508 track 0.203): -23.773,77.58 -22.128,79.231 50.019,79.231 51.665,77.58 51.665,-0.652 50.019,-2.303 -22.254,-2.303 -23.773,-0.779
no net on Bottom Layer (hatched 45Degree grid 0.508 track 0.203): -23.769,77.049 -23.769,77.557 -22.118,79.208 50.018,79.208 51.669,77.557 51.669,-0.675 50.018,-2.326 -22.245,-2.326 -23.769,-0.802

## Keep-outs
Keep-Out Layer:
  lines w0.6: -24.511,-1.016 -24.511,77.978 ; -22.606,-2.921 50.419,-2.921 ; -22.606,79.883 50.419,79.883 ; 52.324,-1.016 52.324,77.978

## Other copper
Top Layer:
  text "76.9624 (mm)" at 5.441,82.116 h1.52 r0.19
  text "83.566 (mm)" at -27.788,30.965 h1.52 r90

## Silkscreen, mask and mechanical layers (free items; w line width, h text height)
Top Overlay:
  drawing of 657 lines, arcs and shapes, not listed
  text "SN:091109" at 32.385,77.47 h1.22
  text "31" at 3.429,54.102 h1
  text "32" at 5.842,54.102 h1
  text "30" at 8.636,54.102 h1
  text "1k" at -17.653,17.907 h1.02 r90
  text "1k" at -12.573,17.907 h1.02 r90
  text "1k" at -10.033,17.907 h1.02 r90
  text "1k" at -7.62,17.907 h1.02 r90
  text "1k" at -15.24,17.78 h1.02 r90
  text "1k" at -4.953,17.78 h1.02 r90
  text "1k" at -2.54,17.78 h1.02 r90
  text "1k" at 0,17.653 h1.02 r90
  text "+5v" at 35.306,-2.032 h1.34
  text "GND" at 41.275,-2.032 h1.34
Mechanical 1:
  lines w0.254: -22.606,79.883 -22.606,80.01
  lines w0.6: -24.511,-1.016 -22.606,-2.921 ; -24.511,77.978 -22.606,79.883 ; 50.419,-2.921 52.324,-1.016 ; 50.419,79.883 52.324,77.978

## Text inside footprints (layer, text, board x,y; h text height)
JP51: Top Overlay "10" at 43.307,62.865 h1.27 r270; Top Overlay "9" at 40.767,62.865 h1.27 r270; Top Overlay "1" at 40.767,76.581 h1.27 r270; Top Overlay "2" at 43.307,77.089 h1.27 r270